# Altium PCB LcMcu.PcbDoc
Units mm, origin at the board's own origin, x right, y up, seen from the top; angles counter-clockwise.
Board outline 70 x 40 mm, 2 copper layers (Component Side, Bottom Layer), stack 1.621 mm thick; 45 components, 48 nets, 181 pads, 100 vias.
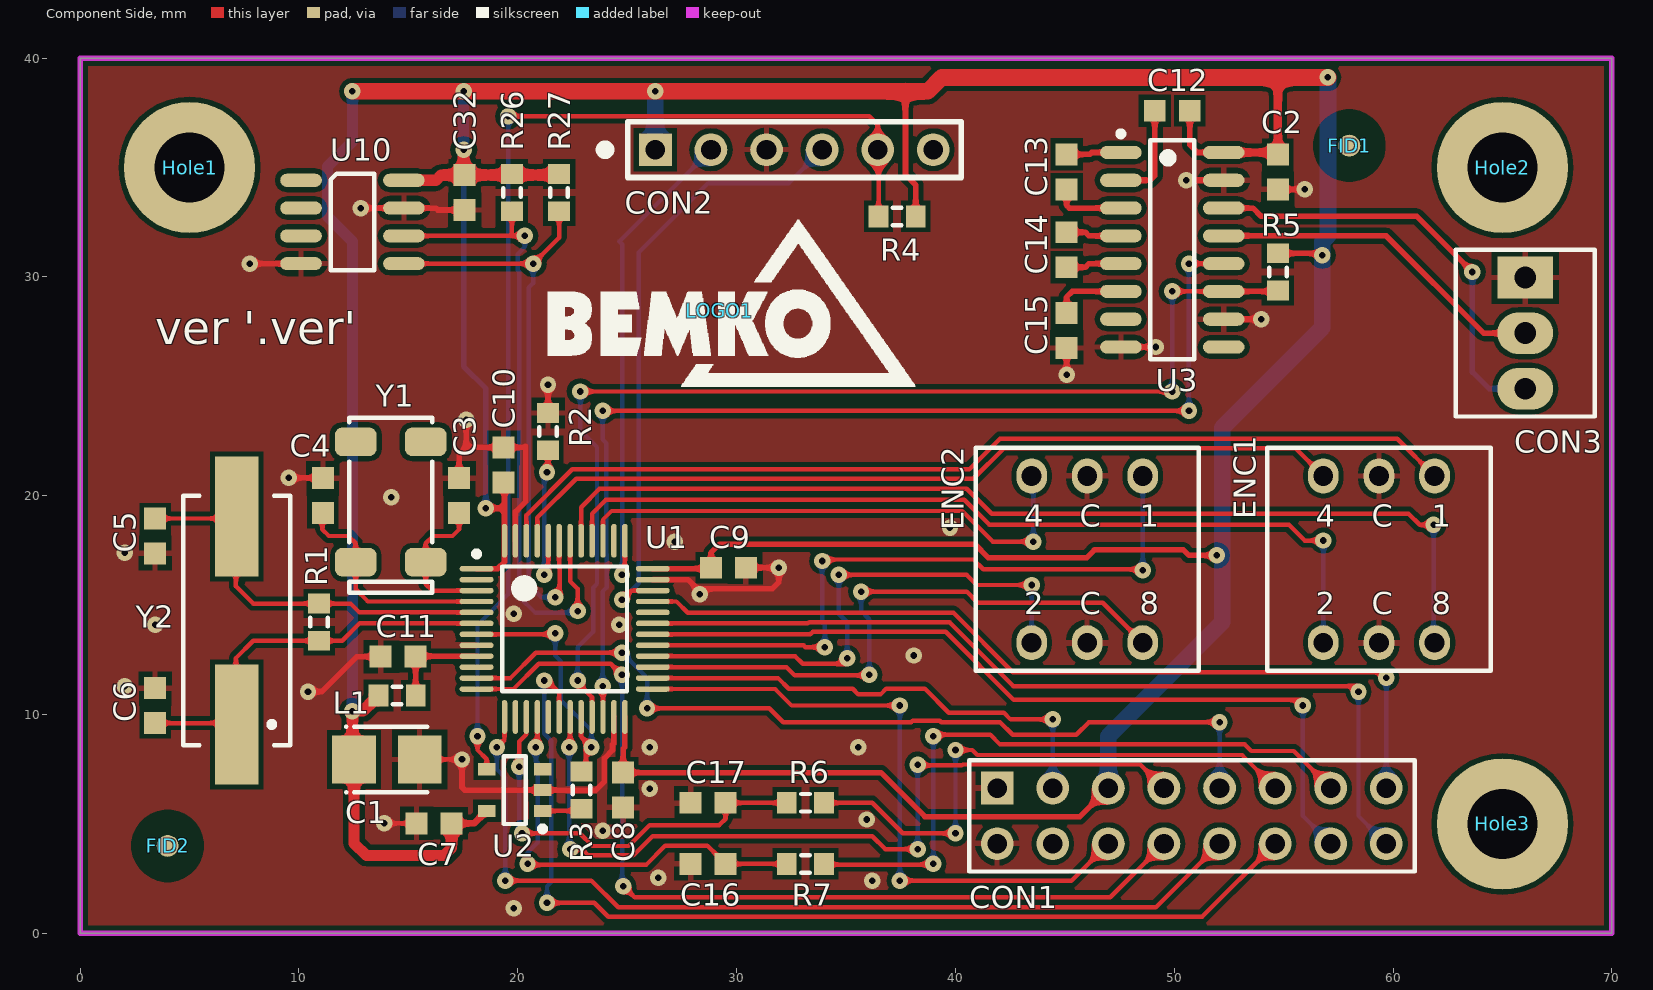
[diagram p0: Component Side view]
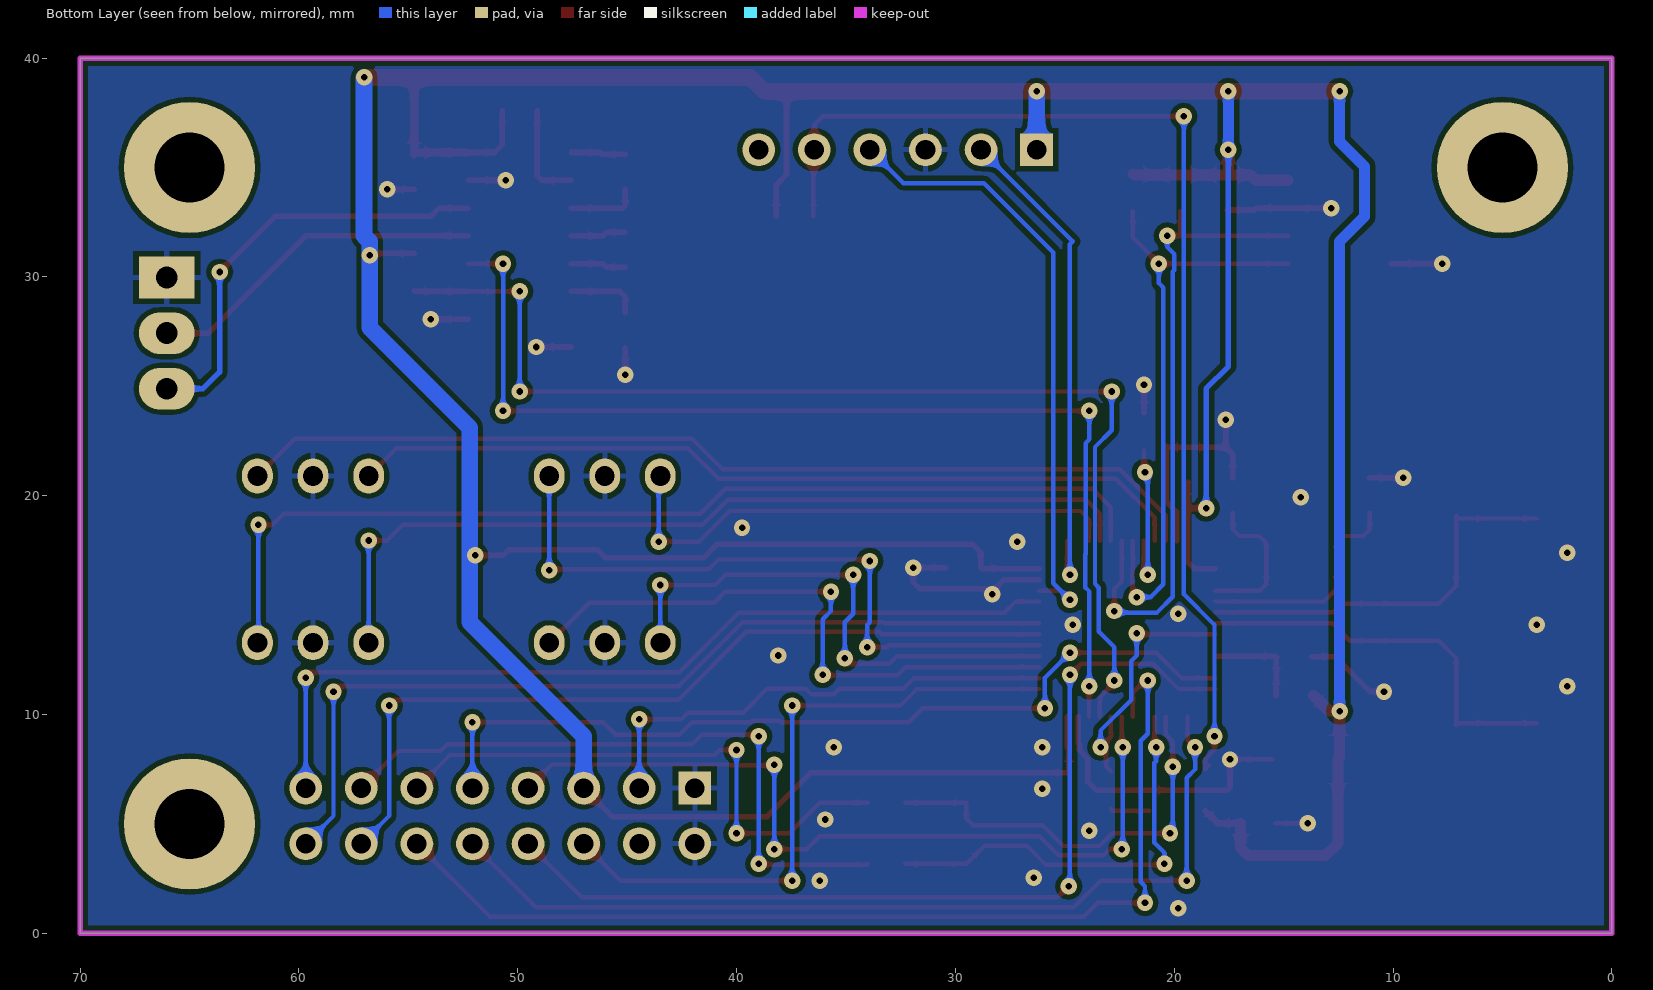
[diagram p1: Bottom Layer view, seen from below]

## Layer stack, top to bottom
Top Solder: solder mask 0.0102, Solder Resist, Dk 3.5
Component Side: signal copper 0.0356
Dielectric 1: core 1.55, FR-4, Dk 4.2
Bottom Layer: signal copper 0.0356
Solder Side: solder mask 0.0102, Solder Resist, Dk 3.5

## Board outline
0,0 70,0 70,40 0,40

## Design rules (kind name [scope] priority, off if disabled: settings)
Clearance [All] p1: gap=0.229
Clearance ShieldClearance_TOP_1 [InNamedPolygon('GND_BOT') vs InNetClass('HIS[2..1]')] p2: gap=0.508
Clearance ShieldClearance_TOP [InNamedPolygon('GND_BOT') vs InNetClass('MOT[8..1]')] p3: gap=0.508
Clearance ShieldClearance_BOT_1 [InNamedPolygon('GND_BOT') vs InNetClass('HIS[2..1]')] p4: gap=0.508
Clearance ShieldClearance_BOT [InNamedPolygon('GND_BOT') vs InNetClass('MOT[8..1]')] p5: gap=0.508
Clearance "Stitching GNDA" [IsStitchingVia and InNet('GNDA') vs (IsVia and (Not IsStitchingVia)) Or IsPad] p6: gap=0.127
DiffPairsRouting DiffPair_100_2DiffPairsRouting [InDifferentialPairClass('DIFF100_2')] p1: maxlimit=0.254 minlimit=0.254 mostfreqgap=0.254 toplayer_minwidth=0.203 toplayer_maxwidth=0.381 toplayer_prefwidth=0.381 bottomlayer_minwidth=0.203 bottomlayer_maxwidth=0.381 bottomlayer_prefwidth=0.381 maxuncoupledlength=12.7
DiffPairsRouting DiffPair_100DiffPairsRouting [InDifferentialPairClass('DIFF100')] p2: maxlimit=0.254 minlimit=0.254 mostfreqgap=0.254 toplayer_minwidth=0.203 toplayer_maxwidth=0.381 toplayer_prefwidth=0.381 bottomlayer_minwidth=0.203 bottomlayer_maxwidth=0.381 bottomlayer_prefwidth=0.381 maxuncoupledlength=12.7
DiffPairsRouting [All] p3: maxlimit=0.254 minlimit=0.203 mostfreqgap=0.203 toplayer_minwidth=0.203 toplayer_maxwidth=0.762 toplayer_prefwidth=0.203 bottomlayer_minwidth=0.203 bottomlayer_maxwidth=0.762 bottomlayer_prefwidth=0.203 maxuncoupledlength=12.7
Height [All] p1: minheight=0 maxheight=50.8 prefheight=12.7
HoleSize [All] p1: absolutevalues=TRUE maxlimit=5.08 minlimit=0.025 maxpercent=80.000 minpercent=20.000
MatchedLengths DiffPair_100_2MatchedLengths [InNetClass('DIFF100_A')] p1: tolerance=25.4 checknetsindiffpair=TRUE checkdiffpairvsdiffpair=FALSE checkxsignals=FALSE checkothers=FALSE
MatchedLengths DiffPair_100MatchedLengths [InNetClass('DIFF100_B')] p2: tolerance=0.127 checknetsindiffpair=TRUE checkdiffpairvsdiffpair=FALSE checkxsignals=FALSE checkothers=FALSE
MinimumSolderMaskSliver [All] p1: minsoldermaskwidth=0.025
PasteMaskExpansion [InNet('230V_N')] p1: expansion=0.508
PlaneClearance [All] p1: clearance=0.254
PlaneConnect MotConnect [InNetClass('MOT[8..1]')] p1: planeconnectstyle=Direct reliefexpansion=0.508 reliefentries=4 reliefconductorwidth=0.254 reliefairgap=0.254
PlaneConnect Via_Thermal_Relief [IsStitchingVia Or IsVia] p2: planeconnectstyle=Direct reliefexpansion=0.508 reliefentries=4 reliefconductorwidth=0.254 reliefairgap=1.016
PlaneConnect ShieldConnect [InNet('SHIELD')] p3: planeconnectstyle=Relief reliefexpansion=0.508 reliefentries=4 reliefconductorwidth=0.254 reliefairgap=1.016
PlaneConnect [All] p4: planeconnectstyle=Relief reliefexpansion=0.203 reliefentries=4 reliefconductorwidth=0.203 reliefairgap=0.127
PolygonConnect GNDA_VIA_CONN [InNet('GND') And (IsStitchingVia Or IsVia)] p1: connectstyle=Direct reliefconductorwidth=0.254 reliefentries=4 polygonreliefangle="90 Angle" airgapwidth=0.254
PolygonConnect [All] p2: connectstyle=Relief reliefconductorwidth=0.254 reliefentries=4 polygonreliefangle="90 Angle" airgapwidth=0.254
RoutingVias [All] p1: holewidth=0.15 width=0.3 viastyle="Through Hole" minholewidth=0.15 minwidth=0.3 maxholewidth=12.7 maxwidth=25.4
SilkToSilkClearance [All] p1: silktosilkclearance=0.127
SilkToSolderMaskClearance SilkscreenOverComponentPads [IsPad] p1: minsilkscreentomaskgap=0.025 clearancetoexposedcopper=TRUE
SolderMaskExpansion vias [IsVia] p1: expansion=0 soldermaskfromhole=TRUE
SolderMaskExpansion [InNet('230V_N')] p2: expansion=0.127
Width GND [InNet('GND')] p1: maxlimit=2.54 minlimit=0.203 preferedwidth=1.27
Width 3V3 [InNet('3V3')] p2: maxlimit=1.016 minlimit=0.203 preferedwidth=0.762
Width 5V [InNet('5V')] p3: maxlimit=2.286 minlimit=0.254 preferedwidth=1.524
Width 24V [InNet('24V')] p4: maxlimit=2.032 minlimit=0.254 preferedwidth=1.524
Width [All] p5: maxlimit=2.54 minlimit=0.152 preferedwidth=0.203
21 further rules are at their usual default settings.

## Classes and differential pairs
net class ENCB[4..1]: ENCB1 ENCB2 ENCB3 ENCB4
net class ENCA[4..1]: ENCA1 ENCA2 ENCA3 ENCA4
component class EEPROM: C32 R26 R27 U10
component class Top: FID1 FID2 Hole1 Hole2 Hole3 LOGO1
component class CONN: C1 CON1
component class MCU: C3 C4 C5 C6 C7 C8 C9 C10 C11 C16 C17 CON2 ENC1 ENC2 L1 R1 R2 R3 R4 R6 R7 U1 U2 Y1 Y2
component class RS232: C2 C12 C13 C14 C15 CON3 R5 U3

## Components (designator, comment, footprint, x,y, rotation, side; value= is the part's Value field where it differs from the comment)
C1 "10uF 25V" SMDB 14.017,7.949 r0 top
C2 "100nF" CAPC1608N 54.737,34.798 r90 top
C3 "6.8pF" CAPC1608N 17.319,20.014 r270 top
C4 "6.8pF" CAPC1608N 11.096,20.014 r270 top
C5 "20pF" CAPC1608N 3.429,18.161 r270 top
C6 "20pF" CAPC1608N 3.429,10.414 r90 top
C7 "100nF" CAPC1608N 16.176,5.028 r0 top
C8 "100nF" CAPC1608N 24.812,6.552 r90 top
C9 "100nF" CAPC1608N 29.638,16.712 r180 top
C10 "100nF" CAPC1608N 19.351,21.411 r270 top
C11 "100nF" CAPC1608N 14.525,12.648 r0 top
C12 "100nF" CAPC1608N 49.911,37.592 r0 top
C13 "100nF" CAPC1608N 45.085,34.798 r90 top
C14 "100nF" CAPC1608N 45.085,31.242 r270 top
C15 "100nF" CAPC1608N 45.085,27.559 r90 top
C16 "100nF" CAPC1608N 28.702,3.175 r0 top
C17 "100nF" CAPC1608N 28.702,5.969 r180 top
C32 "100nF" CAPC1608N 17.573,33.857 r270 top
CON1 "LCMCU" IDC_FEM_BOT_16 41.91,6.64 r0 top
CON2 "SWD" HEADER_6 26.289,35.814 r0 top
CON3 "MX-02204-1031" MX-02204-1031 66.04,27.432 r270 top
ENC1 "ERD1XXX" ERD 59.356,17.093 r0 top
ENC2 "ERD1XXX" ERD 46.021,17.093 r0 top
FID1 "Fiducial" "Fid Round" 58,36 r0 top
FID2 "Fiducial" "Fid Round" 4,4 r90 top
Hole1 "Hole" HOLE-6/3.2 5,35 r0 top
Hole2 "Hole" HOLE-6/3.2 65,35 r0 top
Hole3 "Hole" HOLE-6/3.2 65,5 r0 top
L1 "Ferrite" inductor_0603 15.336,10.87 r90 top
LOGO1 "Logo" LOGO_BEMKO 29.21,28.448 r0 top
R1 "1M" RESC1608N 10.922,14.224 r270 top
R2 "100R" RESC1608N 21.383,22.935 r90 top
R3 "100R" RESC1608N 22.907,6.552 r270 top
R4 "10k" RESC1608N 37.338,32.766 r180 top
R5 "100K" RESC1608N 54.737,30.226 r90 top
R6 "100R" RESC1608N 33.147,5.969 r180 top
R7 "100R" RESC1608N 33.147,3.175 r180 top
R26 "2.2k" RESC1608N 19.732,33.857 r270 top
R27 "2.2k" RESC1608N 21.891,33.857 r270 top
U1 "STM32F098CCT6" LQFP-48_L 22.145,13.918 r0 top locked
U2 "TPS3825" SOT23-5-DBVR 19.859,6.552 r180 top locked
U3 "MAX3232CSE+" SO16_N 49.911,31.242 r0 top
U10 "24_EEPROM" SO-8_L 12.446,32.512 r0 top
Y1 "32768Hz" ABS25-crystal 15.795,16.966 r90 top
Y2 "8MHz" HC49/4H_SMX 7.159,14.299 r90 top

## Footprints (in the part's own frame and the unit in brackets; to place one, negate y for a bottom-side part, rotate by r counter-clockwise, add the part's x,y. Pads: shape width x height; smd on the part's side, far side on the other; paste and mask are expansions set on the pad)
ABS25-crystal [mm]
  rrect50% 1.3x1.9 smd: 1(0,0) 2(0,3.2) ""(5.5,0) ""(5.5,3.2)
  silkscreen extent -1.4,-0.3 6.6,3.5, body extent -1.3,-0.35 6.7,3.45, height 2.43
CAPC1608N [mm] "Chip Capacitor, Body 1.6x0.8mm, IPC Medium Density"
  rect 1x1 smd: 1(-0.8,0) 2(0.8,0)
  body extent -0.8,-0.4 0.8,0.4, height 0.3
ERD [mm]
  oval 1.4x1.6 hole 0.9: 1(2.54,3.81) 2(-2.54,-3.81) 4(-2.54,3.81) 8(2.54,-3.81) C1(0,3.81) C2(0,-3.81)
  silkscreen extent -5.1,-5.1 5.1,5.1, body extent -5,-5 5,5, height 5.31
"Fid Round" [mm]
  round 1 smd paste-2.54 mask+1: 0(0,0)
  Component Side pour cut-out: -1.651,0 -1.525,0.632 -1.167,1.167 -0.632,1.525 0,1.651 0,1.651 0.632,1.525 1.167,1.167 1.525,0.632 1.651,0 1.651,0 1.525,-0.632 1.167,-1.167 0.632,-1.525 0,-1.651 0,-1.651 -0.632,-1.525 -1.167,-1.167 -1.525,-0.632 -1.651,0
HC49/4H_SMX [mm] "Quartz Crystal, SM; Body 13.4 (inc. leads) x 4.9 mm (LxW max)"
  rect 5.5x2 smd paste-1: 1(-4.75,0) 2(4.75,0)
  silkscreen extent -5.7,-2.45 5.7,2.45, body extent -6.7,-2.45 6.7,2.45, height 5.08
HEADER_6 [mm]
  rect 1.5x1.5 hole 0.9: 1(0,0)
  round 1.5 hole 0.9: 2(2.54,0) 3(5.08,0) 4(7.62,0) 5(10.16,0) 6(12.7,0)
  silkscreen extent -2.5,-1.27 13.97,1.27, body extent -1.17,-1.25 14.07,1.25, height 8.23
HOLE-6/3.2 [mm]
  round 6 hole 3.2: 1(0,0)
IDC_FEM_BOT_16 [mm]
  rect 1.5x1.5 hole 0.9: 1(0,0)
  round 1.5 hole 0.9: 2(2.54,0) 3(5.08,0) 4(7.62,0) 5(10.16,0) 6(12.7,0) 7(15.24,0) 8(17.78,0) 9(0,-2.54) 10(2.54,-2.54) 11(5.08,-2.54) 12(7.62,-2.54) 13(10.16,-2.54) 14(12.7,-2.54) 15(15.24,-2.54) 16(17.78,-2.54)
  silkscreen extent -1.27,-3.81 19.08,1.27, body extent -1.27,-3.81 19.05,1.27, height 6.02
inductor_0603 [mm]
  rect 1x0.9 smd: 1(0,0) 2(0,1.7)
  silkscreen extent -0.4,0.65 0.4,1.05, body extent -0.48,0.1 0.47,1.7, height 0.78
LOGO_BEMKO [mm]
  silkscreen extent -7.83,-3.44 8.96,4.16
LQFP-48_L [mm] "Thin QFP, 48-Leads, Body 7x7mm, Pitch 0.5mm, IPC High Density"
  oval 1.55x0.25 smd: 1(-4.025,2.75) 2(-4.025,2.25) 3(-4.025,1.75) 4(-4.025,1.25) 5(-4.025,0.75) 6(-4.025,0.25) 7(-4.025,-0.25) 8(-4.025,-0.75) 9(-4.025,-1.25) 10(-4.025,-1.75) 11(-4.025,-2.25) 12(-4.025,-2.75) 25(4.025,-2.75) 26(4.025,-2.25) 27(4.025,-1.75) 28(4.025,-1.25) 29(4.025,-0.75) 30(4.025,-0.25) 31(4.025,0.25) 32(4.025,0.75) 33(4.025,1.25) 34(4.025,1.75) 35(4.025,2.25) 36(4.025,2.75)
  oval 0.25x1.55 smd: 13(-2.75,-4.025) 14(-2.25,-4.025) 15(-1.75,-4.025) 16(-1.25,-4.025) 17(-0.75,-4.025) 18(-0.25,-4.025) 19(0.25,-4.025) 20(0.75,-4.025) 21(1.25,-4.025) 22(1.75,-4.025) 23(2.25,-4.025) 24(2.75,-4.025) 37(2.75,4.025) 38(2.25,4.025) 39(1.75,4.025) 40(1.25,4.025) 41(0.75,4.025) 42(0.25,4.025) 43(-0.25,4.025) 44(-0.75,4.025) 45(-1.25,4.025) 46(-1.75,4.025) 47(-2.25,4.025) 48(-2.75,4.025)
  silkscreen extent -4.15,-2.85 2.85,3.55, body extent -4.5,-4.49 4.5,4.51, height 1.56
MX-02204-1031 [mm]
  rect 1.905x2.54 hole 1: 1(-2.54,0)
  oval 1.905x2.54 hole 1: 2(0,0) 3(2.54,0)
  silkscreen extent -3.81,-3.18 3.81,3.18, body extent -3.5,-2.95 3.5,2.85, height 11.7
RESC1608N [mm] "Chip Resistor, Body 1.6x0.8mm, IPC Medium Density"
  rect 0.9x1 smd: 1(-0.85,0) 2(0.85,0)
  silkscreen extent -0.2,-0.4 0.2,0.4, body extent -0.8,-0.4 0.8,0.4, height 0.3
SMDB [mm] "Capacitor, SM Tantalum; Body 3.5 x 2.8 mm (LxW typ)"
  rect 2x2.2 smd: 1(-1.5,0) 2(1.5,0)
  silkscreen extent -1.86,-1.5 1.85,1.5, body extent -2.5,-1.5 2.5,1.5, height 2.11
SO16_N [mm]
  oval 1.9x0.6 smd: 1(-2.35,4.445) 2(-2.35,3.175) 3(-2.35,1.905) 4(-2.35,0.635) 5(-2.35,-0.635) 6(-2.35,-1.905) 7(-2.35,-3.175) 8(-2.35,-4.445) 9(2.35,-4.445) 10(2.35,-3.175) 11(2.35,-1.905) 12(2.35,-0.635) 13(2.35,0.635) 14(2.35,1.905) 15(2.35,3.175) 16(2.35,4.445)
  silkscreen extent -2.47,-5 1,5.42, body extent -3,-4.95 3,4.95, height 1.4
SO-8_L [mm] "8-Pin Small Outline Integrated Circuit 1.27 mm Pitch, IPC High Density"
  oval 1.9x0.6 smd: 1(-2.35,1.905) 2(-2.35,0.635) 3(-2.35,-0.635) 4(-2.35,-1.905) 5(2.35,-1.905) 6(2.35,-0.635) 7(2.35,0.635) 8(2.35,1.905)
  silkscreen extent -1,-2.2 1,2.2, body extent -3.17,-2.5 3.17,2.5, height 1.88
SOT23-5-DBVR [mm] "SOT23, 5-Leads, Body 3.05x1.75mm, Pitch 0.95mm, IPC High Density"
  rect 0.8x0.55 smd: 1(-1.275,0.95) 2(-1.275,0) 3(-1.275,-0.95) 4(1.275,-0.95) 5(1.275,0.95)
  silkscreen extent -1.4,-1.55 0.5,1.9, body extent -1.42,-1.46 1.42,1.46, height 1.08

## Part data
C1: library part "Capacitor Tantalum", "Capacitor Tantalum"
C2 C3 C4 C5 C6 C7 C8 C9 C10 C11 C12 C13 C14 C15 C16 C17 C32: library part Capacitor, "Capacitor"
CON2: library part SWD-HEADER
CON3: "Pith 2.54mm, 3-pin"
FID1 FID2: library part "FID ROUND", "round fiducial"
Hole1 Hole2 Hole3: library part HOLE_
L1: library part Inductor, "Inductor"
R1 R2 R3 R4 R5 R6 R7 R26 R27: library part Resistor, "Resistor"
U2: "Uk³ad nadzoruj¹cy; procesor, uk³ad nadzoruj¹cy; push-pull"
U3: library part MAX3232CUE, "3.0V TO 5.5V, Low-Power, up to 1Mbps, True RS-232 Transceiver Using Four 0.1µF External Capacitor"
U10: "16Kbit, 400kHz, 2.5V, I2C Serial EEPROM, 8-Pin SOIC 150mil, Extended Temperature"
Y1: library part HC49, "ABS25-32.768KHZ"
Y2: library part HC49, "HC49"

## Via types
v1: diameter 0.75, hole 0.3, Component Side to Bottom Layer, tented both sides, 71 vias
v2: diameter 0.75, hole 0.3, Component Side to Bottom Layer, 29 vias

## Nets (pads, with @x,y where several pads share a name; then routed paths per layer and width w, separated by ;. In a path a pad name is that pad's centre, name@x,y a point inside that pad or via, vN(x,y) a via of type N, cw(c..) or ccw(c..) an arc to the next point about the centre after c; other vN are vias at no path point)
3V3: C1.1 C2.2 C7.2 C8.2 C9.2 C10.2 C12.2 C32.1 CON1.3 CON2.1 L1.2 R4.1 R5.2 R26.1 R27.1 U1.1 U1.24 U1.36 U1.48 U2.5 U3.16 U10.8 | length 233.1
  Component Side w0.254: U1.1 19.081,16.668 19.395,16.982 U1.48 19.395,19.431 ; v1(18.542,19.431) 19.395,19.431 ; C10.2 19.395,20.567 19.395,19.431 ; U1.24 24.895,8.512 24.812,8.429 C8.2 36.59,7.352 38.608,5.334 45.684,5.334 CON1.3 ; U1.36 28.794,16.668 C9.2 28.838,17.408 29.219,17.789 40.885,17.789 41.498,17.176 46.005,17.176 46.355,17.526 50.419,17.526 50.673,17.272 v1(51.943,17.272) ; 37.719,38.481 37.719,34.671 38.188,34.202 R4.1 ; C12.2 50.711,36.03 51.054,35.687 U3.16 ; R5.2 56.681,31.076 v1(56.769,30.988)
  Component Side w0.305: C7.2 18.01,5.028 U2.5
  Component Side w0.381: U3.16 54.648,35.687 C2.2 54.737,39.116
  Component Side w0.508: L1.2 12.926,10.16 v1(12.446,10.16) 12.446,8.02 C1.1 12.517,4.12 13.081,3.556 16.637,3.556 16.976,3.895 C7.2 ; U10.8 16.256,34.417 16.496,34.657 C32.1 ; v1(17.526,35.814) 17.526,34.704 C32.1 ; R27.1 21.841,34.657 C32.1
  Component Side w0.762: v1(12.446,38.481) v1(17.526,38.481) v1(26.289,38.481) 37.719,38.481 38.735,38.481 39.37,39.116 54.737,39.116 v1(57.023,39.116)
  Bottom Layer w0.254: v1(17.526,35.814) 17.526,25.908 18.542,24.892 v1(18.542,19.431)
  Bottom Layer w0.508: v1(12.446,10.16) 12.446,31.623 11.303,32.766 11.303,35.052 12.446,36.195 v1(12.446,38.481) ; v1(17.526,35.814) v1(17.526,38.481)
  Bottom Layer w0.762: CON2.1 v1(26.289,38.481) ; CON1.3 46.99,9.017 52.197,14.224 52.197,23.114 56.769,27.686 v1(56.769,30.988) 56.769,31.623 57.023,31.877 v1(57.023,39.116)
5V: CON1.10
485DES: CON1.8 U1.33 | length 40
  Component Side w0.203: U1.33 27.25,15.168 27.768,14.65 39.912,14.65 42.623,11.938 59.436,11.938 v2(59.69,11.684)
  Bottom Layer w0.203: CON1.8 v2(59.69,11.684)
485RXS: CON1.16 U1.31 | length 41.1
  Component Side w0.203: U1.31 33.261,14.168 33.311,14.218 39.733,14.218 42.648,11.303 58.166,11.303 v1(58.42,11.049)
  Bottom Layer w0.203: v1(58.42,11.049) 58.42,5.37 CON1.16
485TXS: CON1.15 U1.30 | length 38
  Component Side w0.203: U1.30 33.372,13.668 33.49,13.786 39.554,13.786 42.672,10.668 55.626,10.668 v2(55.88,10.414)
  Bottom Layer w0.203: v2(55.88,10.414) 55.88,5.37 CON1.15
#ACFAIL: CON1.5 U1.11 | length 40.1
  Component Side w0.203: U1.11 19.669,11.668 20.828,12.827 v1(24.765,12.827) ; v1(25.908,10.287) 31.496,10.287 32.131,9.652 37.973,9.652 38.043,9.722 39.281,9.722 39.351,9.652 42.037,9.652 42.615,9.074 45.523,9.074 46.101,9.652 v1(52.07,9.652)
  Bottom Layer w0.203: v1(24.765,12.827) 25.908,11.684 v1(25.908,10.287) ; CON1.5 v1(52.07,9.652)
#LCMAS: CON1.14 U1.18 | length 47.3
  Component Side w0.203: v1(21.209,11.557) 21.336,11.557 21.895,10.998 U1.18 ; v1(21.336,1.397) 23.495,1.397 24.13,0.762 51.272,0.762 CON1.14
  Bottom Layer w0.203: v1(21.209,11.557) 21.209,9.125 21.533,8.801 21.533,2.356 21.336,2.159 v1(21.336,1.397)
#MR: CON2.5 R4.2 U2.4 | length 52.1
  Component Side w0.203: v2(18.161,9.017) 18.161,8.382 18.584,7.959 U2.4 U2.4@18.415,7.671 ; v1(19.558,37.338) 36.068,37.338 36.449,36.957 CON2.5 36.488,35.775 R4.2
  Bottom Layer w0.203: v2(18.161,9.017) 18.161,14.097 19.558,15.494 v1(19.558,37.338)
#RST: R3.1 U1.7 U1.20 | length 12.2
  Component Side w0.203: U1.7 21.669,13.668 v1(21.717,13.716) ; R3.1@22.895,7.414 23.114,7.633 23.114,8.763 22.895,8.982 U1.20
  Bottom Layer w0.203: v1(21.717,13.716) 21.717,12.7 21.971,12.446 21.971,10.668 23.368,9.271 v1(23.368,8.509)
AC#DC: CON1.4 U1.19 | length 38.3
  Component Side w0.203: v1(22.352,8.509) 22.395,8.552 U1.19 ; v1(22.395,3.853) 22.944,3.853 23.235,3.562 25.279,3.562 26.162,4.445 36.195,4.445 36.787,3.853 v1(38.27,3.853) ; v1(38.27,7.704) 38.297,7.677 40.297,7.677 40.341,7.72 48.45,7.72 CON1.4
  Bottom Layer w0.203: v1(22.352,8.509) 22.352,3.896 v1(22.395,3.853) ; v1(38.27,3.853) v1(38.27,7.704)
ENCA1: ENC1.1 U1.46 | length 44.8
  Component Side w0.203: U1.46 20.395,19.113 22.491,21.209 40.64,21.209 42.037,22.606 60.193,22.606 ENC1.1
ENCA2: ENC1.2 U1.40 | length 40.4
  Component Side w0.203: U1.40 23.395,19.179 24.028,19.812 40.41,19.812 41.553,18.669 55.245,18.669 55.96,17.954 v1(56.816,17.954)
  Bottom Layer w0.203: ENC1.2 v1(56.816,17.954)
ENCA3: ENC1.4 U1.45 | length 38.8
  Component Side w0.203: U1.45 20.895,19.003 22.669,20.777 40.819,20.777 42.216,22.174 55.545,22.174 ENC1.4
ENCA4: ENC1.8 U1.41 | length 46.9
  Component Side w0.203: U1.41 22.895,19.481 23.734,20.32 40.513,20.32 41.656,19.177 60.706,19.177 61.214,18.669 v1(61.849,18.669)
  Bottom Layer w0.203: v1(61.849,18.669) 61.849,13.33 ENC1.8
ENCB1: ENC2.1 U1.29 | length 31.3
  Component Side w0.203: U1.29 33.06,13.168 33.147,13.081 v1(34.036,13.081) ; v1(33.909,17.018) 33.979,17.088 40.824,17.088 41.275,16.637 48.514,16.637 v1(48.561,16.59)
  Bottom Layer w0.203: v1@33.909,13.048 33.876,13.081 v1(34.036,13.081) 34.036,14.097 33.909,14.224 v1(33.909,17.018) ; v1(48.561,16.59) ENC2.1
ENCB2: ENC2.2 U1.28 | length 24.7
  Component Side w0.203: U1.28 32.671,12.668 33.02,12.319 34.798,12.319 v1(35.052,12.573) ; v1(34.671,16.383) 40.513,16.383 40.974,15.922 v1(43.481,15.922)
  Bottom Layer w0.203: v1(34.671,16.383) 34.671,14.605 35.052,14.224 v1(35.052,12.573) ; ENC2.2 v1(43.481,15.922)
ENCB3: ENC2.4 U1.39 | length 24.4
  Component Side w0.203: U1.39 23.895,18.913 24.286,19.304 40.308,19.304 41.705,17.907 v1(43.561,17.907)
  Bottom Layer w0.203: ENC2.4 43.434,20.856 43.561,20.729 v1(43.561,17.907)
ENCB4: ENC2.8 U1.27 | length 27.9
  Component Side w0.203: U1.27 32.282,12.168 32.662,11.788 36.045,11.788 v1(36.068,11.811) ; v1(35.687,15.621) 40.513,15.621 41.021,15.113 46.731,15.113 ENC2.8
  Bottom Layer w0.203: v1(35.687,15.621) 35.687,14.732 36.068,14.351 v1(36.068,11.811)
ERR: CON1.11 U1.25 | length 29.8
  Component Side w0.203: U1.25 31.758,11.168 32.512,10.414 v1(37.465,10.414) ; v1(37.465,2.413) 45.303,2.413 CON1.11
  Bottom Layer w0.203: v1(37.465,2.413) v1(37.465,10.414)
GND: C1.2 C2.1 C3.1 C4.1 C5.2 C6.2 C7.1 C8.1 C9.1 C10.1 C11.1 C15.1 C16.1 C17.2 C32.2 CON1.1 CON1.9 CON2.3 CON3.1 ENC1.C1 ENC1.C2 ENC2.C1 ENC2.C2 R2.2 U1.8 U1.23 U1.35 U1.47 U2.2 U3.8 U3.10 U3.15 U10.4 U10.7 | length 54.2
  Component Side w0.203: v2(13.895,5.028) C7.1 ; C1.2 v2(17.451,7.949)
  Component Side w0.254: v2(7.747,30.607) U10.4 ; v2(9.539,20.814) C4.1 ; v1(10.414,11.049) 11.049,11.049 12.648,12.648 C11.1 ; v1(12.827,33.147) U10.7 16.256,33.147 16.346,33.057 C32.2 ; C3.1 17.319,21.891 17.639,22.211 ; v2(17.451,7.949) 17.451,6.679 17.578,6.552 U2.2 23.57,6.552 23.956,6.938 23.956,7.999 24.329,8.372 24.329,8.629 24.395,8.694 U1.23 ; v1(17.639,23.481) 17.639,22.211 ; U1.47 19.895,19.26 20.356,19.721 20.356,22.261 20.306,22.211 C10.1 17.639,22.211 ; R2.2 v2(21.383,25.066) ; U1.35 27.774,16.168 28.194,15.748 31.623,15.748 31.929,16.054 v2(31.929,16.712) C9.1 ; v2(45.085,25.527) C15.1 ; U3.8 v2(49.149,26.797) ; v2(50.546,34.417) U3.15 ; U3.10 v2(53.975,28.067) ; C2.1 v2(55.969,33.998)
  other v1: 19.812,1.143 36.195,2.413 26.416,2.54 23.876,4.699 35.941,5.207 26.035,6.604 26.035,8.509 35.56,8.509 2.032,11.303 38.1,12.7 3.429,14.097 24.638,14.097 19.812,14.605 28.321,15.494 2.032,17.399 27.178,17.907 39.751,18.542 14.224,19.939
ILNADC: CON1.7 R7.1 | length 30.1
  Component Side w0.203: R7.1 34.024,3.148 38.962,3.148 v1(38.989,3.175) ; v1(38.989,9.017) 39.059,9.087 41.586,9.087 42.037,8.636 53.225,8.636 53.525,8.335 55.455,8.335 CON1.7
  Bottom Layer w0.203: v1(38.989,3.175) v1(38.989,9.017)
LAMPSEN: CON1.2 U1.26 | length 22.4
  Component Side w0.203: U1.26 31.893,11.668 32.385,11.176 35.306,11.176 35.56,10.922 36.576,10.922 36.83,11.176 38.608,11.176 39.7,10.084 42.216,10.084 42.521,9.779 v1(44.45,9.779)
  Bottom Layer w0.203: CON1.2 v1(44.45,9.779)
NetC11_2: C11.2 L1.1 U1.9 | length 4.6
  Component Side w0.254: L1.1 15.336,12.637 C11.2 15.345,12.668 U1.9
NetC12_1: C12.1 U3.2 | length 4.6
  Component Side w0.254: U3.2 48.895,34.417 49.111,34.633 C12.1
NetC13_1: C13.1 U3.3 | length 3.3
  Component Side w0.254: C13.1 45.085,33.274 45.212,33.147 U3.3
NetC13_2: C13.2 U3.1 | length 2.5
  Component Side w0.254: C13.2 46.139,35.598 46.228,35.687 U3.1
NetC14_1: C14.1 U3.4 | length 2.5
  Component Side w0.254: C14.1 45.936,32.042 46.101,31.877 U3.4
NetC14_2: C14.2 U3.5 | length 2.5
  Component Side w0.254: C14.2 45.936,30.442 46.101,30.607 U3.5
NetC15_2: C15.2 U3.6 | length 3.3
  Component Side w0.254: C15.2 45.085,29.083 45.339,29.337 U3.6
NetC16_2: C16.2 R7.2 U1.16 | length 19.6
  Component Side w0.203: v1(20.447,3.175) 20.492,3.13 25.863,3.13 26.746,4.013 28.664,4.013 C16.2 R7.2 ; v1(20.828,8.509) 20.835,8.509 20.895,8.569 U1.16
  Bottom Layer w0.203: v1(20.447,3.175) 20.447,3.683 20.904,4.14 20.904,7.798 20.828,7.874 v1(20.828,8.509)
NetC17_1: C17.1 R6.2 U1.15 | length 19.1
  Component Side w0.203: v1(20.066,7.62) 20.066,8.77 20.395,9.099 U1.15 ; v1(20.193,4.572) 22.836,4.572 23.414,3.994 25.076,3.994 26.035,4.953 29.21,4.953 29.502,5.245 C17.1 R6.2
  Bottom Layer w0.203: v1(20.066,7.62) 20.066,4.699 v1(20.193,4.572)
NetR2_1: R2.1 U1.44 | length 7.4
  Component Side w0.203: v2(21.209,16.383) 21.395,16.569 U1.44 ; v2(21.336,21.082) 21.383,21.129 R2.1
  Bottom Layer w0.203: v2(21.209,16.383) 21.209,20.955 v2(21.336,21.082)
NetR3_2: R3.2 U2.1 | length 1.8
  Component Side w0.203: U2.1 22.807,5.602 R3.2
OSC32IN: C3.2 U1.3 Y1.1 | length 6.9
  Component Side w0.203: C3.2 17.319,18.462 17.018,18.161 16.129,18.161 15.795,17.827 Y1.1 15.795,15.955 16.082,15.668 U1.3
OSC32OUT: C4.2 U1.4 Y1.2 | length 10.4
  Component Side w0.203: C4.2@11.071,19.214 11.071,18.462 11.372,18.161 12.261,18.161 12.595,17.827 Y1.2 12.595,15.726 13.153,15.168 U1.4
OSCIN: C5.1 R1.1 U1.5 Y2.2 | length 18.5
  Component Side w0.203: C5.1 6.995,18.961 7.121,19.087 7.121,15.866 7.913,15.074 R1.1 12.358,15.074 12.764,14.668 U1.5
OSCOUT: C6.1 R1.2 U1.6 Y2.1 | length 18.5
  Component Side w0.203: C6.1 7.018,9.614 7.121,9.511 7.121,12.582 7.913,13.374 R1.2 11.977,13.374 12.771,14.168 U1.6
RS_RX: CON3.2 U3.13 | length 15.6
  Component Side w0.254: U3.13 52.261,31.882 59.685,31.882 64.135,27.432 CON3.2
RS_TX: CON3.3 U3.14 | length 19.9
  Component Side w0.254: U3.14 53.594,33.147 53.975,32.766 61.087,32.766 v2(63.627,30.226)
  Bottom Layer w0.254: v2(63.627,30.226) 63.627,25.654 64.389,24.892 CON3.3
RXDEB: U1.22 U3.12 | length 49.3
  Component Side w0.203: v2(23.876,11.303) 23.895,11.284 U1.22 ; v1(23.876,23.876) v2(50.673,23.876) ; v2(50.673,30.607) U3.12
  Bottom Layer w0.203: v2(23.876,11.303) 23.876,15.621 24.06,15.805 24.06,17.329 24.054,17.335 24.054,22.404 23.876,22.582 v1(23.876,23.876) ; v2(50.673,23.876) v2(50.673,30.607)
RXM: CON1.13 U1.13 | length 42.3
  Component Side w0.203: v1(19.05,8.509) 19.395,8.854 U1.13 ; v1(19.431,2.413) 23.368,2.413 24.587,1.194 49.164,1.194 CON1.13
  Bottom Layer w0.203: v1(19.05,8.509) 19.05,7.493 19.431,7.112 v1(19.431,2.413) v1@19.304,2.54
SCL: R26.2 U1.42 U10.6 | length 29.7
  Component Side w0.203: U10.6 19.685,31.877 ; R26.2 19.732,31.924 19.685,31.877 ; v2(20.32,31.877) 19.685,31.877 ; U1.42 22.395,16.086 22.733,15.748 v2(22.733,14.732)
  Bottom Layer w0.203: v2(20.32,31.877) 20.32,31.369 19.996,31.045 19.996,30.315 20.066,30.245 20.066,15.386 20.79,14.662 22.663,14.662 v2(22.733,14.732)
SDA: R27.2 U1.43 U10.5 | length 27.7
  Component Side w0.203: U10.5 v2(20.701,30.607) 21.891,31.797 R27.2 ; v2(21.717,15.367) 21.914,15.564 21.914,16.675 21.895,16.694 U1.43
  Bottom Layer w0.203: v2(20.701,30.607) 20.701,29.718 20.498,29.515 20.498,15.951 21.082,15.367 v2(21.717,15.367)
SWCLK: CON2.2 U1.37 | length 22.8
  Component Side w0.203: v2(24.765,16.383) 24.895,16.513 U1.37
  Bottom Layer w0.203: v2(24.765,16.383) 24.765,31.496 24.638,31.623 CON2.2
SWDIO: CON2.4 U1.34 | length 28.3
  Component Side w0.203: v2@24.948,15.24 v2(24.765,15.24) 25.193,15.668 U1.34
  Bottom Layer w0.203: v2(24.765,15.24) 25.527,16.002 25.527,31.115 28.702,34.29 32.385,34.29 CON2.4
TXDEB: R5.1 U1.21 U3.11 | length 52.3
  Component Side w0.203: v2(22.733,11.557) 22.733,11.449 23.395,10.787 U1.21 ; v1(22.86,24.765) v2(49.911,24.765) ; v2(49.911,29.337) U3.11
  Component Side w0.254: U3.11 54.698,29.337 R5.1
  Bottom Layer w0.203: v2(22.733,11.557) 22.733,13.081 23.444,13.792 23.444,15.8 23.622,15.978 23.622,22.225 22.86,22.987 v1(22.86,24.765) ; v2(49.911,24.765) v2(49.911,29.337)
TXM: CON1.12 U1.12 | length 43.1
  Component Side w0.203: U1.12 19.804,11.168 20.955,12.319 24.252,12.319 v1@24.76,11.811 ; v1@24.636,11.811 v1@24.76,11.811 ; v1(24.765,11.811) v1@24.76,11.811 ; v1(24.828,2.159) 25.336,1.651 47.081,1.651 CON1.12
  Bottom Layer w0.203: v1(24.765,11.811) 24.765,2.222 v1(24.828,2.159)
UACADC: CON1.6 R6.1 | length 25.7
  Component Side w0.203: R6.1 36.195,5.969 37.592,4.572 v1(40.005,4.572) ; v1(40.005,8.382) 40.767,8.382 40.997,8.152 53.098,8.152 CON1.6
  Bottom Layer w0.203: v1(40.005,4.572) v1(40.005,8.382)
pads on no net: CON2.6 FID1.0 FID2.0 Hole1.1 Hole2.1 Hole3.1 U1.2 U1.10 U1.14 U1.17 U1.32 U1.38 U2.3 U3.7 U3.9 U10.1 U10.2 U10.3 Y1.

## Polygon pours and split planes (outlines as drawn)
GND on Component Side "GND_TOP" (solid, remove dead copper, pour order 0): 0,40.005 0,0 70.104,0 70.485,0.381 70.485,40.005
GND on Bottom Layer "GND_BOT" (solid, remove dead copper, pour order 2): 0,40.005 0,0 70.104,0 70.485,0.381 70.485,40.005

## Keep-outs
Keep-Out Layer:
  the board outline again, w0.254

## Silkscreen, mask and mechanical layers (free items; w line width, h text height)
Top Overlay:
  text "ver '.ver'" at 3.429,26.924 h1.52

## Text inside footprints (layer, text, board x,y; h text height)
ENC1: Top Overlay "1" at 61.756,18.593 h1.02; Top Overlay "C" at 59.016,18.593 h1.02; Top Overlay "4" at 56.476,18.593 h1.02; Top Overlay "8" at 61.756,14.593 h1.02; Top Overlay "C" at 59.016,14.593 h1.02; Top Overlay "2" at 56.476,14.593 h1.02
ENC2: Top Overlay "1" at 48.421,18.593 h1.02; Top Overlay "C" at 45.681,18.593 h1.02; Top Overlay "4" at 43.141,18.593 h1.02; Top Overlay "8" at 48.421,14.593 h1.02; Top Overlay "C" at 45.681,14.593 h1.02; Top Overlay "2" at 43.141,14.593 h1.02